# Altium PCB ZYNQ-HS-DEV-PCB.PcbDoc (part 6 of 10)
Units mm, origin at the board's own origin, x right, y up, seen from the top; angles counter-clockwise.
Board outline 125.25 x 111 mm, 10 copper layers (S1 (SIG), S2 (GND), S3 (SIG), S4 (GND), S5 (PWR), S6 (SIG), S7 (GND), S8 (SIG), S9 (GND), S10 (SIG)), stack 1.597 mm thick; 539 components, 408 nets, 2443 pads, 876 vias.
Unrouted connection lines stored in the file: 1310.
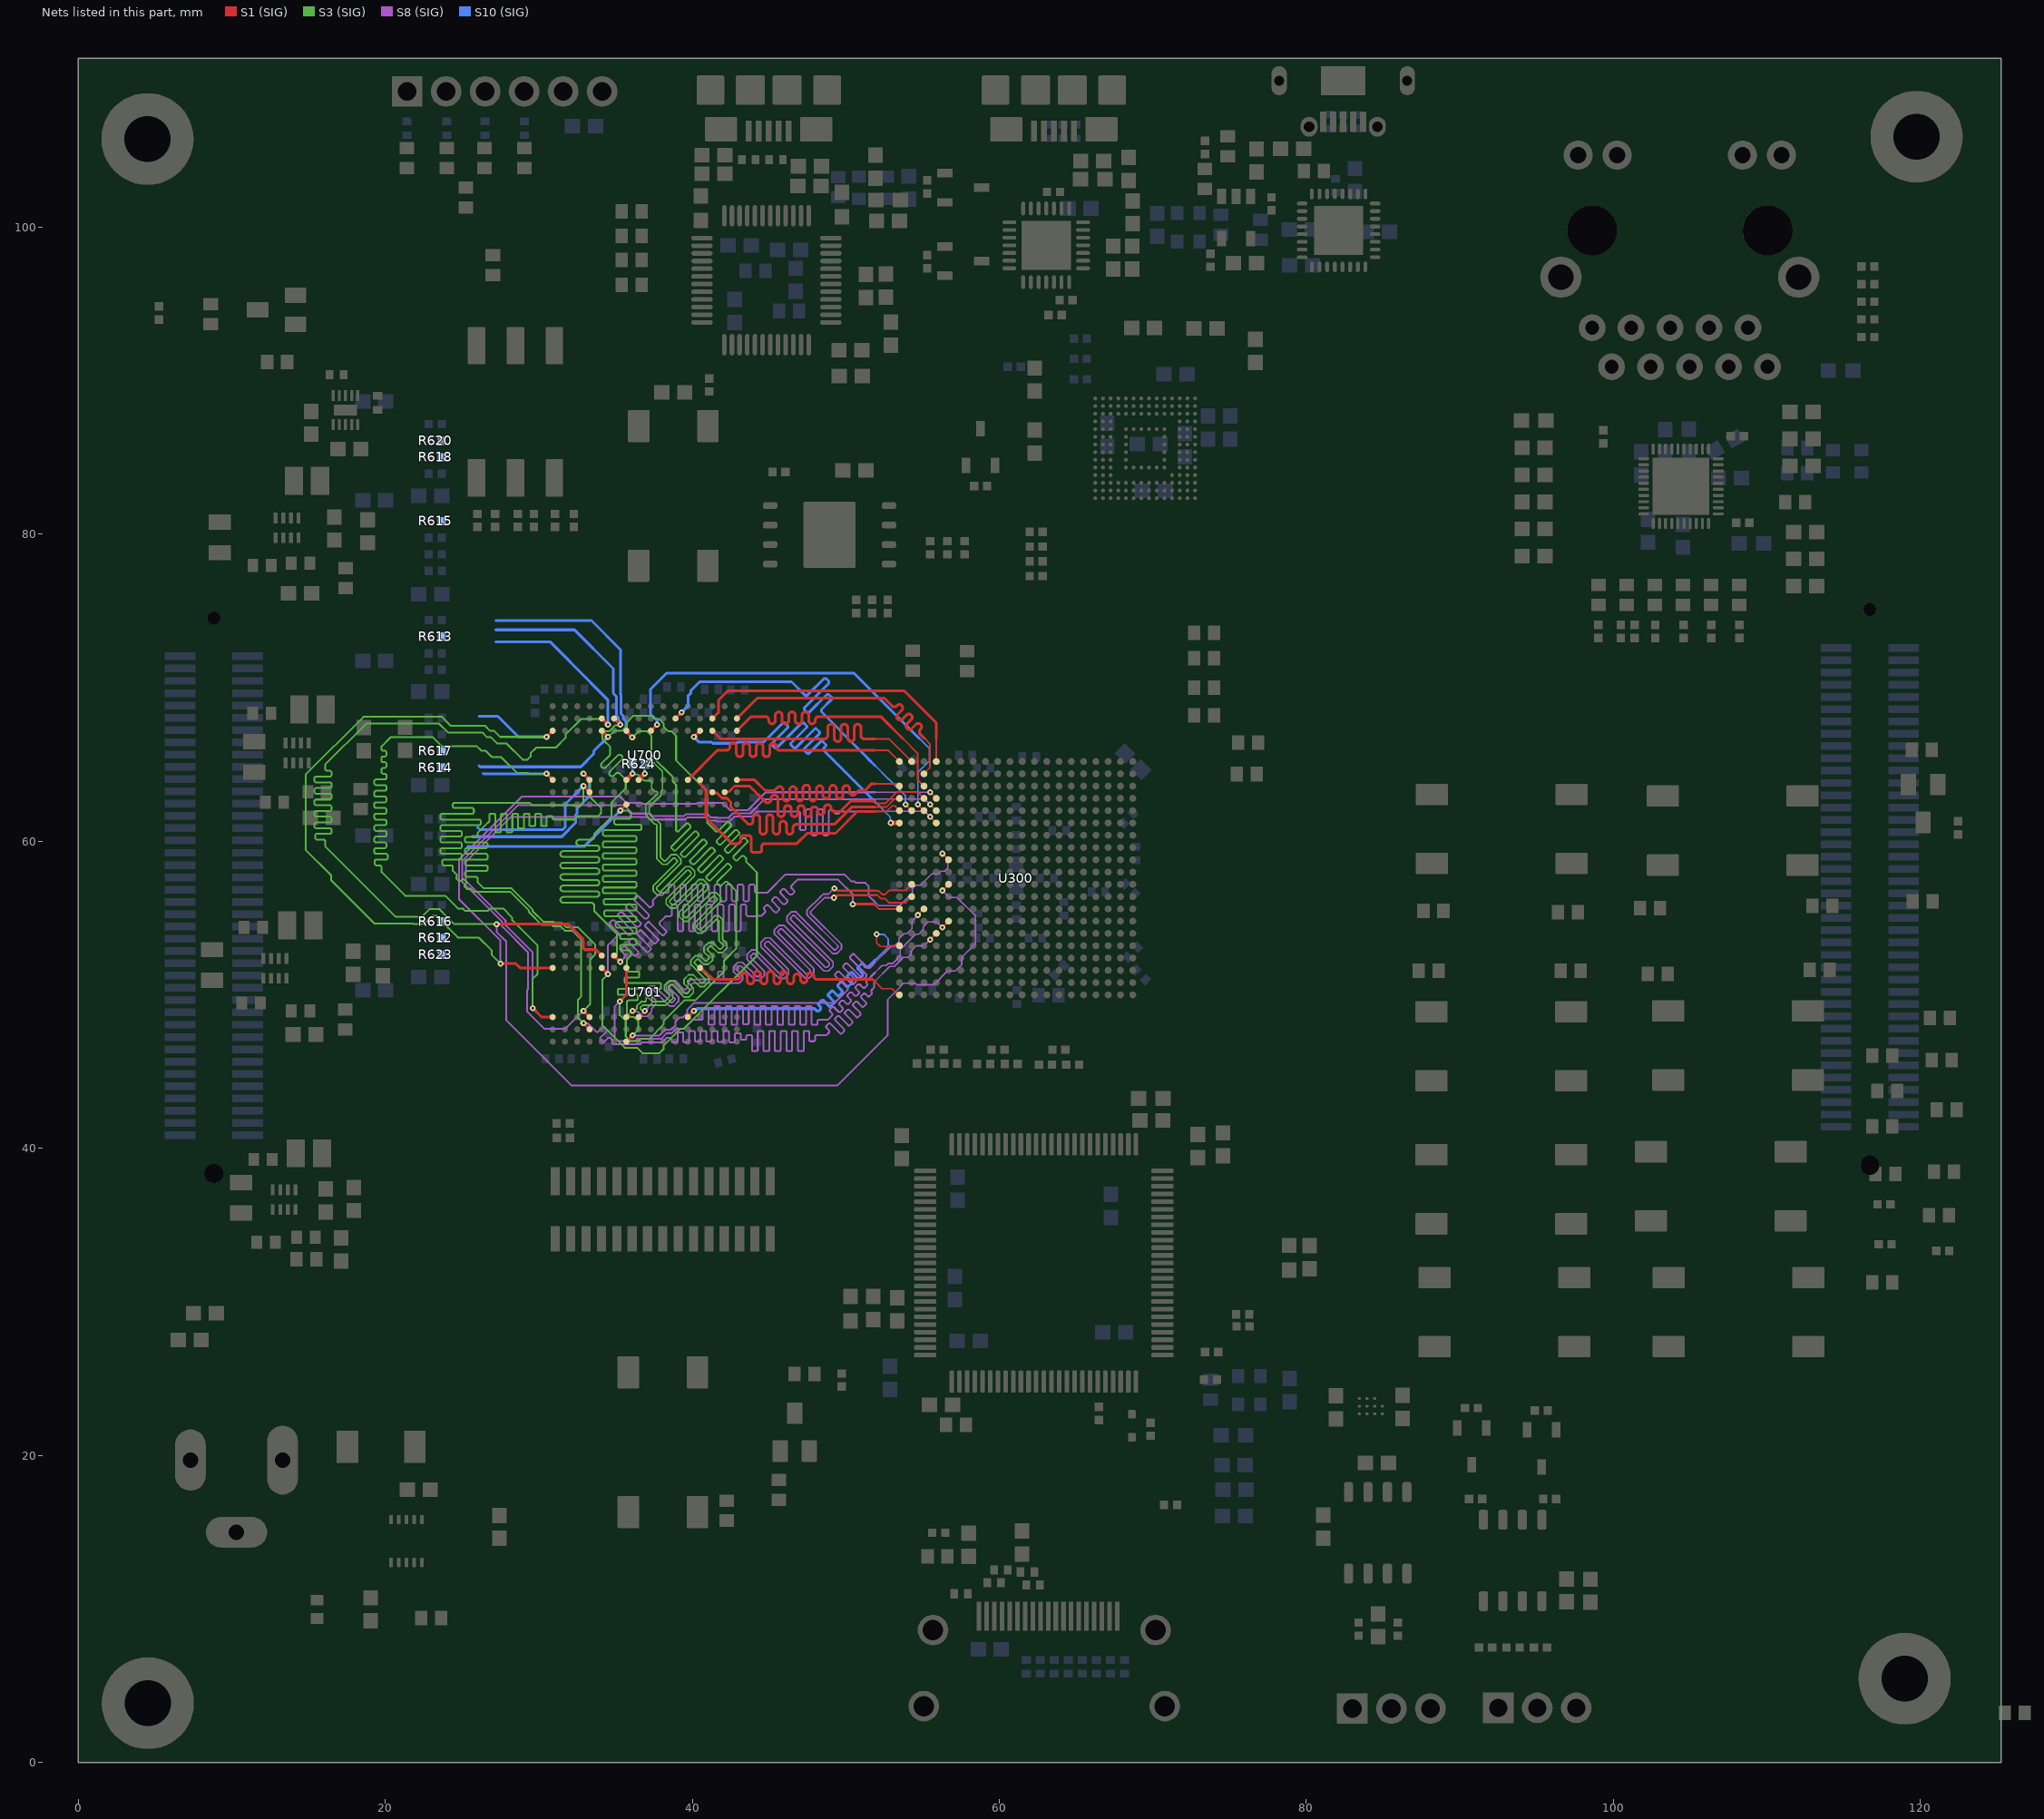
[diagram p10: the nets of this part, all layers, seen from the top]

## Via types
v1: diameter 0.4, hole 0.15, S1 (SIG) to S10 (SIG), tented both sides, 746 vias
v2: diameter 0.5, hole 0.25, S1 (SIG) to S10 (SIG), tented both sides, 108 vias
v3: diameter 0.5, hole 0.2, S1 (SIG) to S10 (SIG), tented both sides, 11 vias
v4: diameter 0.6, hole 0.3, S1 (SIG) to S10 (SIG), tented both sides, 10 vias
v5: diameter 0.45, hole 0.15, S1 (SIG) to S10 (SIG), tented both sides, 1 vias

## Nets (pads, with @x,y where several pads share a name; then routed paths per layer and width w, separated by ;. In a path a pad name is that pad's centre, name@x,y a point inside that pad or via, vN(x,y) a via of type N, cw(c..) or ccw(c..) an arc to the next point about the centre after c; other vN are vias at no path point) (continued)
DDR_A12: R612.2 U300.E4 U700.N7 U701.N7 | length 110.2
  S1 (SIG) w0.11: v1(55.488,62.395) U300.E4@55.888,61.995
  S1 (SIG) w0.18: v1(32.9,48.95) U701.N7@33.3,48.55 ; v1(32.9,64.4) U700.N7@33.3,64
  S3 (SIG) w0.119: v1(32.9,48.95) 33.34,49.39 33.34,52.299 33.675,52.634 33.675,53.266 32.546,54.395 31.783,54.395 31.51,54.669 31.02,54.669 30.921,54.767 30.283,54.767 29.582,55.468 29.582,55.566 28.216,56.932 26.418,56.932 26,57.35 26,57.55 26,57.61 25.925,57.684 25.265,57.684 25.19,57.759 25.19,57.983 25.265,58.057 26.575,58.057 26.65,58.132 26.65,58.356 26.575,58.431 25.265,58.431 25.19,58.505 25.19,58.729 25.265,58.804 26.575,58.804 26.65,58.878 26.65,59.102 26.575,59.177 25.265,59.177 25.19,59.252 25.19,59.476 25.265,59.55 26.575,59.55 26.65,59.625 26.65,59.849 26.575,59.923 25.265,59.923 25.19,59.998 25.19,60.222 25.265,60.297 25.925,60.297 26,60.371 26,60.448 26,60.525 26.683,61.208 26.743,61.268 ccw(c26.652,61.357) 26.779,61.357 26.779,61.72 cw(c26.854,61.72) 26.854,61.794 27.078,61.794 cw(c27.078,61.72) 27.153,61.72 27.153,60.655 ccw(c27.227,60.655) 27.227,60.58 27.451,60.58 ccw(c27.451,60.655) 27.526,60.655 27.526,61.72 cw(c27.601,61.72) 27.601,61.794 27.824,61.794 cw(c27.824,61.72) 27.899,61.72 27.899,60.655 ccw(c27.974,60.655) 27.974,60.58 28.198,60.58 ccw(c28.198,60.655) 28.272,60.655 28.272,61.72 cw(c28.347,61.72) 28.347,61.794 28.571,61.794 cw(c28.571,61.72) 28.645,61.72 28.645,60.922 ccw(c28.72,60.922) 28.72,60.847 28.944,60.847 ccw(c28.944,60.922) 29.019,60.922 29.019,61.72 cw(c29.093,61.72) 29.093,61.794 29.317,61.794 cw(c29.317,61.72) 29.392,61.72 29.392,61.057 ccw(c29.466,61.057) 29.466,60.983 29.69,60.983 ccw(c29.69,61.057) 29.765,61.057 29.765,61.72 cw(c29.84,61.72) 29.84,61.794 30.064,61.794 cw(c30.064,61.72) 30.138,61.72 30.138,61.057 ccw(c30.213,61.057) 30.213,60.983 30.437,60.983 ccw(c30.437,61.057) 30.511,61.057 30.511,61.566 cw(c30.586,61.566) 30.586,61.64 30.81,61.64 cw(c30.81,61.566) 30.885,61.566 30.885,61.54 ccw(c31.004,61.54) 31.004,61.421 32.34,61.421 32.524,61.605 32.559,61.64 33.849,61.64 34.06,61.851 34.06,62.149 33.34,62.868 33.34,63.96 v1(32.9,64.4)
  S8 (SIG) w0.1: 51.9,62.745 55.138,62.745 v1(55.488,62.395)
  S8 (SIG) w0.119: v1(32.9,48.95) 32.882,48.95 31.722,47.79 30.351,47.79 29.24,48.901 29.24,50.322 29.304,50.385 29.304,52.747 27.61,54.442 27.61,54.749 25.021,57.337 25.021,58.734 28.647,62.36 35.55,62.36 36.104,61.806 37.166,61.806 37.331,61.64 39.449,61.64 39.578,61.769 40.972,61.769 41.176,61.565 41.644,61.565 41.694,61.515 42.324,61.515 42.629,61.821 43.789,61.821 44.713,62.745 51.9,62.745
  S10 (SIG) w0.18: 25.65,60.3 31.49,60.3 32.385,61.195 32.385,61.704 32.49,61.809 32.49,62.142 33.29,62.942 33.29,64.01 v1(32.9,64.4)
DDR_A13: R613.2 U300.D4 U700.T3 U701.T3 | length 90.1
  S1 (SIG) w0.11: v1(55.488,63.195) U300.D4@55.888,62.795
  S1 (SIG) w0.18: v1(27.5,52.025) 27.52,52.045 28.483,52.045 28.778,51.75 U701.T3@30.9,51.75 ; v1(30.5,66.8) U700.T3@30.9,67.2
  S3 (SIG) w0.119: v1(27.5,52.025) 26.935,52.59 26.935,52.874 26.071,53.738 24.722,53.738 23.56,54.9 23.56,54.924 23.349,55.135 23.051,55.135 22.516,54.6 21.845,54.6 21.792,54.653 19.272,54.653 16.466,57.459 16.466,57.779 14.806,59.439 14.806,64.336 18.574,68.104 23.683,68.104 24.264,67.522 26.494,67.522 26.805,67.212 27.063,67.212 27.475,66.8 v1(30.5,66.8)
  S8 (SIG) w0.1: 51.9,63.195 v1(55.488,63.195)
  S8 (SIG) w0.119: v1(27.5,52.025) 27.5,53.535 24.802,56.233 24.802,58.825 28.877,62.9 35.319,62.9 35.724,62.495 36.696,62.495 36.751,62.44 40.249,62.44 40.304,62.495 41.988,62.495 42.443,62.04 43.624,62.04 44.778,63.195 51.9,63.195
  S10 (SIG) w0.18: 26.1,68.15 27.325,68.15 28.675,66.8 v1(30.5,66.8)
DDR_A14: R614.2 U300.F4 U700.T7 U701.T7 | length 108
  S1 (SIG) w0.11: v1(55.488,61.595) U300.F4@55.888,61.195
  S1 (SIG) w0.18: v1(29.6,49.125) 30.175,48.55 U701.T7@30.9,48.55 ; v1(30.5,64.4) U700.T7@30.9,64
  S3 (SIG) w0.119: v1(29.6,49.125) 29.6,51.044 29.917,51.361 29.917,53.204 28.267,54.854 28.267,55.021 27.671,55.617 26.829,55.617 26.688,55.477 25.177,55.477 25.036,55.617 24.726,55.617 23.894,56.45 21.295,56.45 19.755,57.99 19.755,58.3 19.755,58.36 19.68,58.434 19.385,58.434 19.31,58.509 19.31,58.733 19.385,58.807 20.073,58.807 20.148,58.882 20.148,59.106 20.073,59.181 19.362,59.181 19.287,59.255 19.287,59.479 19.362,59.554 19.989,59.554 20.064,59.628 20.064,59.852 19.989,59.927 19.362,59.927 19.287,60.002 19.287,60.226 19.362,60.3 19.989,60.3 20.064,60.375 20.064,60.599 19.989,60.673 19.362,60.673 19.287,60.748 19.287,60.972 19.362,61.047 19.989,61.047 20.064,61.121 20.064,61.345 19.989,61.42 19.362,61.42 19.287,61.494 19.287,61.718 19.362,61.793 19.989,61.793 20.064,61.868 20.064,62.091 19.989,62.166 19.362,62.166 19.287,62.241 19.287,62.465 19.362,62.539 19.989,62.539 20.064,62.614 20.064,62.838 19.989,62.913 19.362,62.913 19.287,62.987 19.287,63.211 19.362,63.286 19.989,63.286 20.064,63.36 20.064,63.584 19.989,63.659 19.362,63.659 19.287,63.734 19.287,63.957 19.362,64.032 19.989,64.032 20.064,64.107 20.064,64.331 19.989,64.405 19.823,64.405 19.748,64.48 19.748,64.704 19.823,64.778 19.989,64.778 20.064,64.853 20.064,65.077 19.989,65.152 19.808,65.152 19.733,65.226 19.733,65.45 19.808,65.525 19.989,65.525 20.064,65.599 20.064,65.823 19.989,65.898 19.83,65.898 19.755,65.973 19.755,66.19 20.28,66.715 20.354,66.789 23.081,66.789 23.663,66.207 25.95,66.207 26.26,65.896 26.519,65.896 26.93,65.485 27.542,65.485 28.588,64.439 29.315,64.439 29.354,64.4 v1(30.5,64.4)
  S8 (SIG) w0.1: 51.9,61.945 55.138,61.945 v1(55.488,61.595)
  S8 (SIG) w0.119: v1(29.6,49.125) 29.6,52.761 27.829,54.532 27.829,54.84 25.24,57.428 25.24,58.643 28.184,61.587 37.075,61.587 37.24,61.421 39.54,61.421 39.669,61.55 40.881,61.55 41.085,61.346 41.553,61.346 41.603,61.296 42.414,61.296 42.72,61.602 43.88,61.602 44.223,61.945 46.5,61.945 46.933,61.945 47.007,61.87 47.007,60.797 47.082,60.722 47.306,60.722 47.381,60.797 47.381,62.007 47.455,62.082 47.679,62.082 47.754,62.007 47.754,60.459 47.828,60.385 48.052,60.385 48.127,60.459 48.127,62.007 48.202,62.082 48.426,62.082 48.5,62.007 48.5,60.459 48.575,60.385 48.799,60.385 48.873,60.459 48.873,61.955 48.948,62.029 49.172,62.029 49.247,61.955 49.247,61.87 49.321,61.795 49.545,61.795 49.62,61.87 49.694,61.945 51.675,61.945 51.9,61.945
  S10 (SIG) w0.18: 26.375,64.425 26.4,64.4 v1(30.5,64.4)
DDR_BA0: R615.2 U300.L5 U700.M2 U701.M2 | length 121.8
  S1 (SIG) w0.11: v1(56.288,56.795) U300.L5@56.688,57.195
  S1 (SIG) w0.18: v1(27.25,54.6) 31.9,54.6 32.875,53.625 32.875,53.527 32.89,53.512 32.89,53.04 32.99,52.94 33.71,52.94 U701.M2@34.1,52.55 ; U700.M2@34.1,68 v1(34.5,67.6)
  S3 (SIG) w0.119: v1(27.25,54.6) 24.48,54.6 23.998,55.082 23.998,55.106 23.531,55.573 22.869,55.573 22.388,55.091 20.657,55.091 16.445,59.303 16.075,59.673 16.075,60.035 16,60.109 15.5,60.109 15.426,60.184 15.426,60.408 15.5,60.483 16.41,60.483 16.484,60.557 16.484,60.781 16.41,60.856 15.449,60.856 15.375,60.93 15.375,61.154 15.449,61.229 16.41,61.229 16.484,61.304 16.484,61.528 16.41,61.602 15.449,61.602 15.375,61.677 15.375,61.901 15.449,61.975 16.41,61.975 16.484,62.05 16.484,62.274 16.41,62.349 15.449,62.349 15.375,62.423 15.375,62.647 15.449,62.722 16.41,62.722 16.484,62.796 16.484,63.02 16.41,63.095 15.449,63.095 15.375,63.17 15.375,63.394 15.449,63.468 16.41,63.468 16.484,63.543 16.484,63.767 16.41,63.841 15.449,63.841 15.375,63.916 15.375,64.14 15.449,64.215 16.41,64.215 16.484,64.289 16.484,64.513 16.41,64.588 16.15,64.588 16.075,64.662 16.075,64.935 16.075,64.985 18.755,67.665 23.501,67.665 24.083,67.084 26.313,67.084 26.623,66.773 26.882,66.773 27.293,66.362 27.905,66.362 28.951,65.315 29.249,65.315 29.46,65.526 29.46,65.737 29.826,66.104 31.112,66.104 31.74,66.732 31.74,66.949 32.751,67.96 34.14,67.96 v1(34.5,67.6)
  S8 (SIG) w0.1: 52.729,48.45 52.729,49.698 53.538,50.506 53.538,50.54 53.743,50.745 54.513,50.745 54.613,50.645 55.715,50.645 56.615,51.545 57.133,51.545 57.538,51.95 57.538,52.423 58.438,53.323 58.438,55.14 57.233,56.345 56.738,56.345 v1(56.288,56.795)
  S8 (SIG) w0.119: v1(27.25,54.6) 27.25,54.095 27.86,53.485 27.86,48.372 32.151,44.081 49.426,44.081 52.729,47.384 52.729,48.45
  S10 (SIG) w0.18: 27.2,73 30.719,73 33.415,70.304 33.415,70.285 34.5,69.2 v1(34.5,67.6)
DDR_BA1: R616.2 U300.R4 U700.N8 U701.N8 | length 114
  S1 (SIG) w0.11: v1(55.488,53.595) U300.R4@55.888,53.995
  S1 (SIG) w0.18: v1(32.9,48.15) U701.N8@33.3,47.75 ; v1(32.9,63.6) U700.N8@33.3,63.2
  S3 (SIG) w0.119: v1(32.9,48.15) 32.54,48.51 32.54,49.672 32.754,49.885 32.754,53.605 32.182,54.176 31.692,54.176 31.419,54.45 30.929,54.45 30.831,54.548 30.192,54.548 29.363,55.377 29.363,55.475 28.125,56.713 25.762,56.713 25.6,56.875 25.558,56.917 25.452,56.917 25.422,56.887 25.316,56.887 25.158,57.045 25.158,57.151 25.27,57.263 25.27,57.369 25.112,57.527 25.006,57.527 24.894,57.415 24.789,57.415 24.63,57.573 24.63,57.678 24.661,57.709 24.661,57.814 24.505,57.97 24.463,58.012 24.4,58.075 24.4,58.3 24.4,58.36 24.325,58.434 23.775,58.434 23.701,58.509 23.701,58.733 23.775,58.807 24.908,58.807 24.983,58.882 24.983,59.106 24.908,59.181 23.65,59.181 23.575,59.255 23.575,59.479 23.65,59.554 24.908,59.554 24.983,59.628 24.983,59.852 24.908,59.927 23.65,59.927 23.575,60.002 23.575,60.226 23.65,60.3 24.911,60.3 24.985,60.375 24.985,60.599 24.911,60.673 23.65,60.673 23.575,60.748 23.575,60.972 23.65,61.047 26.137,61.047 26.212,61.121 26.212,61.345 26.137,61.42 23.65,61.42 23.575,61.494 23.575,61.718 23.65,61.793 25.686,61.793 25.76,61.868 25.76,62.091 25.686,62.166 24.475,62.166 24.4,62.241 24.4,62.443 24.47,62.513 29.381,62.513 29.535,62.36 32.249,62.36 32.309,62.3 32.691,62.3 32.9,62.509 v1(32.9,63.6)
  S8 (SIG) w0.1: 51.9,50.887 52.858,51.845 53.156,51.845 53.747,52.435 54.023,52.435 54.238,52.65 54.238,52.84 54.588,53.19 55.083,53.19 v1(55.488,53.595)
  S8 (SIG) w0.119: v1(32.9,48.15) 33.175,48.15 33.217,48.108 33.745,47.58 33.85,47.58 34.153,47.883 34.259,47.883 34.417,47.724 34.417,47.619 33.986,47.188 33.986,47.082 34.144,46.924 34.25,46.924 34.53,47.204 34.636,47.204 34.794,47.046 34.794,46.846 34.869,46.771 35.032,46.771 36.613,46.771 36.753,46.912 38.043,46.912 38.191,47.06 38.335,47.203 38.542,47.203 cw(c38.542,47.084) 38.661,47.084 38.661,46.972 ccw(c38.736,46.972) 38.736,46.897 38.96,46.897 ccw(c38.96,46.972) 39.035,46.972 39.035,47.481 cw(c39.109,47.481) 39.109,47.556 39.333,47.556 cw(c39.333,47.481) 39.408,47.481 39.408,46.984 ccw(c39.482,46.984) 39.482,46.91 39.706,46.91 ccw(c39.706,46.984) 39.781,46.984 39.781,47.572 cw(c39.856,47.572) 39.856,47.646 40.08,47.646 cw(c40.08,47.572) 40.154,47.572 40.154,47.028 ccw(c40.229,47.028) 40.229,46.954 40.453,46.954 ccw(c40.453,47.028) 40.527,47.028 40.527,47.572 cw(c40.602,47.572) 40.602,47.646 40.826,47.646 cw(c40.826,47.572) 40.901,47.572 40.901,47.028 ccw(c40.975,47.028) 40.975,46.954 41.199,46.954 ccw(c41.199,47.028) 41.274,47.028 41.274,47.572 cw(c41.348,47.572) 41.348,47.646 41.572,47.646 cw(c41.572,47.572) 41.647,47.572 41.647,46.99 ccw(c41.722,46.99) 41.722,46.916 41.945,46.916 ccw(c41.945,46.99) 42.02,46.99 42.02,47.572 cw(c42.095,47.572) 42.095,47.646 42.319,47.646 cw(c42.319,47.572) 42.393,47.572 42.393,46.984 ccw(c42.468,46.984) 42.468,46.91 42.692,46.91 ccw(c42.692,46.984) 42.766,46.984 42.766,47.427 cw(c42.841,47.427) 42.841,47.502 43.065,47.502 cw(c43.065,47.427) 43.14,47.427 43.14,47.159 ccw(c43.214,47.159) 43.214,47.085 43.438,47.085 ccw(c43.438,47.159) 43.513,47.159 43.513,47.291 cw(c43.588,47.291) 43.588,47.365 43.811,47.365 cw(c43.811,47.291) 43.886,47.291 43.886,46.407 ccw(c43.961,46.407) 43.961,46.332 44.185,46.332 ccw(c44.185,46.407) 44.259,46.407 44.259,47.572 cw(c44.334,47.572) 44.334,47.646 44.558,47.646 cw(c44.558,47.572) 44.632,47.572 44.632,46.407 ccw(c44.707,46.407) 44.707,46.332 44.931,46.332 ccw(c44.931,46.407) 45.006,46.407 45.006,47.572 cw(c45.08,47.572) 45.08,47.646 45.304,47.646 cw(c45.304,47.572) 45.379,47.572 45.379,46.407 ccw(c45.453,46.407) 45.453,46.332 45.677,46.332 ccw(c45.677,46.407) 45.752,46.407 45.752,47.572 cw(c45.827,47.572) 45.827,47.646 46.051,47.646 cw(c46.051,47.572) 46.125,47.572 46.125,46.407 ccw(c46.2,46.407) 46.2,46.332 46.424,46.332 ccw(c46.424,46.407) 46.498,46.407 46.498,47.572 cw(c46.573,47.572) 46.573,47.646 46.797,47.646 cw(c46.797,47.572) 46.872,47.572 46.872,46.407 ccw(c46.946,46.407) 46.946,46.332 47.17,46.332 ccw(c47.17,46.407) 47.245,46.407 47.245,47.572 cw(c47.319,47.572) 47.319,47.646 47.543,47.646 cw(c47.543,47.572) 47.618,47.572 47.618,47.046 ccw(c47.693,47.046) 47.693,46.971 47.917,46.971 ccw(c47.917,47.046) 47.991,47.046 47.991,47.246 cw(c48.11,47.246) 48.11,47.365 48.35,47.365 48.729,47.365 48.882,47.518 48.924,47.56 48.924,47.659 48.706,47.877 48.706,47.956 48.891,48.141 48.97,48.141 49.639,47.472 49.718,47.472 49.903,47.657 49.903,47.736 49.284,48.354 49.284,48.433 49.469,48.618 49.548,48.618 50.167,48 50.246,48 50.43,48.184 50.43,48.264 49.924,48.77 49.924,48.849 50.109,49.034 50.188,49.034 50.694,48.528 50.774,48.528 50.958,48.712 50.958,48.791 50.452,49.298 50.452,49.377 50.637,49.562 50.716,49.562 51.061,49.216 51.14,49.216 51.325,49.401 51.325,49.48 50.98,49.826 50.98,49.905 51.164,50.089 51.244,50.089 51.436,49.897 51.516,49.897 51.7,50.081 51.7,50.16 51.662,50.199 51.662,50.298 51.853,50.489 51.853,50.84 51.9,50.887
  S10 (SIG) w0.18: 26,60.925 26.165,60.76 31.554,60.76 31.71,60.916 31.71,62.41 v1(32.9,63.6)
DDR_BA2: R617.2 U300.J5 U700.M3 U701.M3 | length 113.9
  S1 (SIG) w0.11: v1(56.288,59.195) U300.J5@56.688,58.795
  S1 (SIG) w0.18: U701.M3@34.1,51.75 v1(34.5,51.35) ; U700.M3@34.1,67.2 v1(34.5,66.8)
  S3 (SIG) w0.119: v1(34.5,51.35) 34.14,50.99 34.14,48.001 35.589,46.552 36.389,46.552 36.751,46.19 37.849,46.19 38.14,46.482 38.14,46.699 39.232,47.79 39.449,47.79 44.2,52.541 44.2,57.975 43.813,58.362 43.77,58.405 43.493,58.682 43.493,58.788 43.493,58.893 43.335,59.052 43.229,59.052 42.928,58.75 42.822,58.75 42.664,58.909 42.664,59.014 43.588,59.938 43.588,60.044 43.429,60.202 43.324,60.202 42.369,59.247 42.263,59.247 42.105,59.405 42.105,59.511 43.06,60.466 43.06,60.571 42.902,60.73 42.796,60.73 41.841,59.775 41.735,59.775 41.577,59.933 41.577,60.038 42.532,60.994 42.532,61.099 42.374,61.257 42.268,61.257 41.646,60.635 41.54,60.635 41.498,60.677 40.965,61.21 40.965,63.243 38.94,65.268 38.94,66.868 38.649,67.16 38.432,67.16 38.14,67.451 38.14,67.668 37.849,67.96 37.632,67.96 37.413,68.179 36.17,68.179 35.74,67.749 35.74,67.532 35.401,67.193 34.911,67.193 34.519,66.8 v1(34.5,66.8)
  S8 (SIG) w0.1: 51.9,56.035 52.135,55.8 53.511,55.8 54.338,56.626 54.338,56.94 54.543,57.145 54.856,57.145 55.591,57.88 56.043,57.88 56.208,58.045 56.433,58.045 56.638,58.25 56.638,58.54 56.525,58.652 56.525,58.957 v1(56.288,59.195)
  S8 (SIG) w0.119: v1(34.5,51.35) 34.5,53.225 35.15,53.875 35.192,53.917 35.192,54.023 34.619,54.596 34.619,54.702 34.777,54.86 34.882,54.86 35.847,53.896 35.953,53.896 36.111,54.054 36.111,54.159 35.146,55.124 35.146,55.23 35.305,55.388 35.41,55.388 36.375,54.423 36.48,54.423 36.639,54.582 36.639,54.687 35.674,55.652 35.674,55.757 35.832,55.916 35.938,55.916 36.903,54.951 37.008,54.951 37.166,55.109 37.166,55.215 36.202,56.18 36.202,56.285 36.36,56.444 36.466,56.444 37.191,55.718 37.297,55.718 37.455,55.876 37.455,55.982 37.409,56.028 37.409,56.134 37.663,56.387 37.925,56.65 38.331,56.65 38.391,56.65 38.465,56.725 38.465,57.105 38.54,57.179 38.764,57.179 38.839,57.105 38.839,56.167 38.913,56.093 39.137,56.093 39.212,56.167 39.212,57.105 39.286,57.179 39.51,57.179 39.585,57.105 39.585,56.167 39.66,56.093 39.884,56.093 39.958,56.167 39.958,57.105 40.033,57.179 40.257,57.179 40.331,57.105 40.331,56.167 40.406,56.093 40.63,56.093 40.705,56.167 40.705,57.105 40.779,57.179 41.003,57.179 41.078,57.105 41.078,56.167 41.152,56.093 41.376,56.093 41.451,56.167 41.451,57.105 41.526,57.179 41.75,57.179 41.824,57.105 41.824,56.167 41.899,56.093 42.123,56.093 42.197,56.167 42.197,57.105 42.272,57.179 42.496,57.179 42.571,57.105 42.571,56.167 42.645,56.093 42.869,56.093 42.944,56.167 42.944,57.105 43.018,57.179 43.242,57.179 43.317,57.105 43.317,56.167 43.392,56.093 43.615,56.093 43.69,56.167 43.69,57.106 43.765,57.181 43.989,57.181 44.063,57.106 44.063,56.725 44.138,56.65 44.542,56.65 44.875,56.65 46.06,57.835 49.897,57.835 50.334,57.398 50.537,57.398 50.65,57.285 51.27,57.285 51.473,57.082 51.473,56.462 51.9,56.035
  S10 (SIG) w0.18: 26.1,64.925 26.175,64.85 32.727,64.85 33.58,65.703 33.58,65.88 v1(34.5,66.8)
DDR_CAS_B: R620.2 U300.P5 U700.K3 U701.K3 | length 121.6
  S1 (SIG) w0.11: v1(56.288,54.395) U300.P5@56.688,54.795
  S1 (SIG) w0.18: v1(35.275,49.575) 35.7,50 35.7,51.712 U701.K3@35.686,51.725 ; U700.K3@35.686,67.175 v1(36.086,66.775)
  S3 (SIG) w0.119: v1(35.275,49.575) 35.275,48.684 35.66,48.299 35.66,47.282 35.951,46.99 36.5,46.99 36.638,47.129 37.187,47.129 38.14,48.082 38.14,48.299 39.476,49.634 40.183,49.634 42.06,51.511 42.06,52.218 42.86,53.018 42.86,56.765 42.515,57.11 42.473,57.152 42.255,57.37 42.149,57.37 41.874,57.095 41.769,57.095 41.61,57.253 41.61,57.359 42.518,58.266 42.518,58.372 42.36,58.53 42.254,58.53 41.168,57.444 41.063,57.444 40.904,57.603 40.904,57.708 41.99,58.794 41.99,58.9 41.832,59.058 41.726,59.058 40.639,57.971 40.533,57.971 40.375,58.129 40.375,58.235 41.462,59.322 41.462,59.428 41.304,59.586 41.199,59.586 40.113,58.5 40.007,58.5 39.849,58.658 39.849,58.764 40.935,59.85 40.935,59.955 40.776,60.114 40.671,60.114 39.527,58.969 39.421,58.969 39.263,59.128 39.263,59.233 40.407,60.378 40.407,60.483 40.249,60.641 40.143,60.641 38.902,59.401 38.797,59.401 38.638,59.559 38.638,59.665 39.879,60.905 39.879,61.011 39.721,61.169 39.615,61.169 39.088,60.642 38.983,60.642 38.94,60.684 38.94,63.668 38.721,63.887 38.721,64.183 37.34,65.564 37.34,66.868 37.049,67.16 36.478,67.16 36.094,66.775 v1(36.086,66.775)
  S8 (SIG) w0.1: 51.9,51.45 52.35,51.9 52.63,51.9 52.775,52.045 53.058,52.045 53.538,52.525 53.538,52.94 54.543,53.945 54.733,53.945 55.05,54.262 55.05,54.452 55.343,54.745 55.938,54.745 v1(56.288,54.395)
  S8 (SIG) w0.119: v1(35.275,49.575) 34.94,49.24 34.94,47.21 35.16,46.99 36.249,46.99 36.389,47.131 37.952,47.131 38.325,47.504 38.672,47.504 38.964,47.796 39.146,47.796 39.151,47.79 39.449,47.79 40.028,48.37 40.25,48.37 40.563,48.37 ccw(c40.563,48.489) 40.682,48.489 40.682,49.086 cw(c40.757,49.086) 40.757,49.161 40.981,49.161 cw(c40.981,49.086) 41.056,49.086 41.056,48.116 ccw(c41.13,48.116) 41.13,48.042 41.354,48.042 ccw(c41.354,48.116) 41.429,48.116 41.429,49.181 cw(c41.503,49.181) 41.503,49.256 41.727,49.256 cw(c41.727,49.181) 41.802,49.181 41.802,48.116 ccw(c41.877,48.116) 41.877,48.042 42.101,48.042 ccw(c42.101,48.116) 42.175,48.116 42.175,49.181 cw(c42.25,49.181) 42.25,49.256 42.474,49.256 cw(c42.474,49.181) 42.548,49.181 42.548,48.116 ccw(c42.623,48.116) 42.623,48.042 42.847,48.042 ccw(c42.847,48.116) 42.922,48.116 42.922,49.181 cw(c42.996,49.181) 42.996,49.256 43.22,49.256 cw(c43.22,49.181) 43.295,49.181 43.295,48.159 ccw(c43.369,48.159) 43.369,48.085 43.593,48.085 ccw(c43.593,48.159) 43.668,48.159 43.668,49.181 cw(c43.743,49.181) 43.743,49.256 43.966,49.256 cw(c43.966,49.181) 44.041,49.181 44.041,48.116 ccw(c44.116,48.116) 44.116,48.042 44.34,48.042 ccw(c44.34,48.116) 44.414,48.116 44.414,49.181 cw(c44.489,49.181) 44.489,49.256 44.713,49.256 cw(c44.713,49.181) 44.788,49.181 44.788,48.116 ccw(c44.862,48.116) 44.862,48.042 45.086,48.042 ccw(c45.086,48.116) 45.161,48.116 45.161,49.181 cw(c45.235,49.181) 45.235,49.256 45.459,49.256 cw(c45.459,49.181) 45.534,49.181 45.534,48.116 ccw(c45.609,48.116) 45.609,48.042 45.832,48.042 ccw(c45.832,48.116) 45.907,48.116 45.907,49.181 cw(c45.982,49.181) 45.982,49.256 46.206,49.256 cw(c46.206,49.181) 46.28,49.181 46.28,48.116 ccw(c46.355,48.116) 46.355,48.042 46.579,48.042 ccw(c46.579,48.116) 46.653,48.116 46.653,49.181 cw(c46.728,49.181) 46.728,49.256 46.952,49.256 cw(c46.952,49.181) 47.027,49.181 47.027,48.116 ccw(c47.101,48.116) 47.101,48.042 47.325,48.042 ccw(c47.325,48.116) 47.4,48.116 47.4,49.181 cw(c47.474,49.181) 47.474,49.256 47.698,49.256 cw(c47.698,49.181) 47.773,49.181 47.773,48.116 ccw(c47.848,48.116) 47.848,48.042 48.072,48.042 ccw(c48.072,48.116) 48.146,48.116 48.146,48.25 cw(c48.265,48.25) 48.265,48.37 48.325,48.37 48.82,48.37 49.113,48.663 49.113,48.769 48.946,48.936 48.946,49.042 49.104,49.2 49.21,49.2 49.535,48.875 49.64,48.875 49.799,49.034 49.799,49.139 49.575,49.363 49.575,49.469 49.733,49.627 49.839,49.627 50.063,49.403 50.168,49.403 50.327,49.561 50.327,49.667 50.103,49.89 50.103,49.996 50.262,50.154 50.367,50.154 50.59,49.931 50.696,49.931 50.854,50.089 50.854,50.195 50.631,50.418 50.631,50.523 50.79,50.682 50.895,50.682 51.118,50.459 51.224,50.459 51.382,50.617 51.382,50.723 51.33,50.775 51.33,50.88 51.9,51.45
  S10 (SIG) w0.18: 27.2,74.375 33.425,74.375 35.325,72.475 35.325,69.563 35.34,69.548 35.34,68.317 35.485,68.172 35.485,67.996 35.69,67.791 35.69,67.172 v1(36.086,66.775)
DDR_CK_N: R624.1 U300.M2 U700.K7 U701.K7 | length 106.7
  S1 (SIG) w0.114: U701.K7@35.7,48.55 v1(36.1,48.95)
  S1 (SIG) w0.121: 51.9,56.475 51.9,56.5 51.912,56.512 52.009,56.512 52.021,56.525 52.025,56.525 52.274,56.276 52.522,56.276 52.788,56.009 53.902,56.009 U300.M2@54.288,56.395
  S1 (SIG) w0.15: v1(49.225,56.325) 49.288,56.325 49.438,56.475 51.9,56.475
  S1 (SIG) w0.3: U700.K7@35.7,64 v1(36.1,64.4)
  S3 (SIG) w0.109: v1(36.1,48.95) 36.156,49.006 36.296,49.006 36.382,49.092 36.382,49.28 36.652,49.549 36.865,49.549 36.919,49.549 36.992,49.622 36.992,50.096 37.064,50.168 37.282,50.168 37.355,50.096 37.355,49.622 37.427,49.549 38.033,49.549 38.166,49.549 38.408,49.792 38.496,49.879 38.496,49.982 38.172,50.305 38.172,50.603 38.465,50.895 38.763,50.895 39.574,50.084 39.676,50.084 39.83,50.238 39.83,50.341 39.46,50.711 39.46,51.009 39.753,51.301 40.051,51.301 40.581,50.771 40.683,50.771 40.837,50.925 40.837,51.028 39.907,51.958 39.907,52.256 40.2,52.548 40.498,52.548 40.829,52.217 40.932,52.217 41.086,52.371 41.086,52.473 40.754,52.805 40.754,53.103 41.046,53.395 41.345,53.395 41.754,52.985 41.857,52.985 42.011,53.139 42.011,53.242 41.725,53.528 41.725,54.05 41.725,54.816 41.638,54.904 41.535,54.904 40.64,54.009 40.342,54.009 40.05,54.301 40.05,54.599 41.609,56.159 41.609,56.261 41.455,56.415 41.353,56.415 39.728,54.79 39.43,54.79 39.137,55.083 39.137,55.381 40.762,57.006 40.762,57.108 40.608,57.262 40.506,57.262 38.881,55.637 38.583,55.637 38.291,55.93 38.291,56.228 39.915,57.852 39.915,57.955 39.761,58.109 39.659,58.109 38.034,56.484 37.736,56.484 37.444,56.776 37.444,57.075 39.01,58.641 39.01,58.744 38.856,58.898 38.754,58.898 38.348,58.492 38.049,58.492 37.834,58.707 37.747,58.795 37.675,58.866 37.675,61.061 37.611,61.125 37.525,61.125 37.108,61.542 37.108,61.608 36.964,61.752 36.964,62.363 37.629,63.028 37.661,63.028 37.725,63.091 37.725,63.182 37.661,63.246 37.553,63.246 37.346,63.453 37.346,63.747 37.387,63.788 37.387,63.878 37.311,63.954 36.842,63.954 36.452,64.344 36.156,64.344 v1(36.1,64.4)
  S8 (SIG) w0.109: v1(36.1,48.95) 36.156,48.894 36.454,48.894 36.753,48.596 37.047,48.596 37.346,48.894 37.346,49.097 37.606,49.357 37.606,49.655 37.175,50.086 37.175,50.189 37.329,50.343 37.432,50.343 38.508,49.267 38.806,49.267 39.098,49.559 39.098,49.857 38.521,50.434 38.521,50.536 38.675,50.69 38.778,50.69 39.354,50.114 39.653,50.114 39.945,50.406 39.945,50.677 40.017,50.75 40.52,50.75 40.529,50.76 41.112,50.76 41.122,50.75 41.266,50.75 41.276,50.76 41.859,50.76 41.868,50.75 42.013,50.75 42.022,50.76 42.605,50.76 42.615,50.75 42.759,50.75 42.769,50.76 43.046,50.76 43.103,50.816 43.259,50.973 43.259,51.271 42.909,51.621 42.909,51.724 43.063,51.878 43.166,51.878 44.093,50.95 44.391,50.95 44.683,51.242 44.683,51.541 43.797,52.427 43.797,52.53 43.951,52.684 44.053,52.684 45.68,51.058 45.978,51.058 46.27,51.35 46.27,51.648 44.702,53.216 44.702,53.319 44.856,53.473 44.958,53.473 47.328,51.103 47.626,51.103 47.918,51.396 47.918,51.694 45.58,54.032 45.58,54.135 45.733,54.289 45.836,54.289 48.575,51.55 48.873,51.55 49.165,51.843 49.165,52.141 46.396,54.91 46.396,55.013 46.55,55.167 46.652,55.167 49.12,52.698 49.419,52.698 49.711,52.991 49.711,53.289 47.695,55.305 47.695,55.408 48.494,56.207 48.612,56.325 v1(49.225,56.325)
  S10 (SIG) w0.15: R624.1@36.075,65.025 36.1,65 v1(36.1,64.4)
DDR_CK_P: R624.2 U300.L2 U700.J7 U701.J7 | length 106.7
  S1 (SIG) w0.114: U701.J7@36.5,48.55 v1(36.9,48.95)
  S1 (SIG) w0.121: 51.9,56.775 52.126,56.775 52.377,56.524 52.532,56.524 52.817,56.809 53.902,56.809 U300.L2@54.288,57.195
  S1 (SIG) w0.15: v1(49.252,56.924) 49.315,56.924 49.465,56.775 51.9,56.775
  S1 (SIG) w0.3: U700.J7@36.5,64 v1(36.9,64.4)
  S3 (SIG) w0.109: v1(36.9,48.95) 36.844,49.006 36.704,49.006 36.618,49.092 36.618,49.182 36.749,49.313 38.263,49.313 38.575,49.625 38.732,49.781 38.732,50.08 38.408,50.403 38.408,50.505 38.562,50.659 38.665,50.659 39.476,49.848 39.774,49.848 40.066,50.141 40.066,50.439 39.696,50.809 39.696,50.911 39.85,51.065 39.953,51.065 40.483,50.535 40.781,50.535 41.073,50.827 41.073,51.126 40.143,52.056 40.143,52.158 40.297,52.312 40.4,52.312 40.731,51.981 41.03,51.981 41.322,52.273 41.322,52.571 40.99,52.903 40.99,53.005 41.144,53.159 41.247,53.159 41.657,52.749 41.955,52.749 42.247,53.042 42.247,53.34 41.961,53.626 41.961,53.814 41.961,54.914 41.892,54.983 41.804,55.071 41.735,55.14 41.437,55.14 40.543,54.245 40.44,54.245 40.286,54.399 40.286,54.502 41.845,56.061 41.845,56.359 41.553,56.651 41.255,56.651 39.63,55.026 39.527,55.026 39.373,55.18 39.373,55.283 40.998,56.908 40.998,57.206 40.706,57.498 40.408,57.498 38.783,55.873 38.68,55.873 38.526,56.027 38.526,56.13 40.151,57.755 40.151,58.053 39.859,58.345 39.561,58.345 37.936,56.72 37.833,56.72 37.68,56.874 37.68,56.977 39.246,58.543 39.246,58.842 38.954,59.134 38.656,59.134 38.25,58.728 38.147,58.728 38.001,58.874 37.914,58.961 37.911,58.964 37.911,61.159 37.709,61.361 37.623,61.361 37.344,61.64 37.344,61.706 37.2,61.85 37.2,62.265 37.727,62.792 37.759,62.792 37.961,62.994 37.961,63.246 38.054,63.339 38.054,64.547 37.501,65.1 36.875,65.1 36.75,64.975 36.75,64.8 36.844,64.706 36.844,64.456 v1(36.9,64.4)
  S8 (SIG) w0.109: v1(36.9,48.95) 37.11,49.159 37.11,49.195 37.37,49.455 37.37,49.558 36.939,49.988 36.939,50.286 37.231,50.579 37.529,50.579 38.605,49.503 38.708,49.503 38.862,49.657 38.862,49.759 38.285,50.336 38.285,50.634 38.578,50.926 38.876,50.926 39.452,50.35 39.555,50.35 39.709,50.504 39.709,50.775 39.92,50.986 40.422,50.986 40.432,50.996 40.805,50.996 41.585,50.996 41.658,51.068 41.658,51.446 41.73,51.519 41.948,51.519 42.021,51.446 42.021,51.068 42.093,50.996 42.662,50.996 42.923,50.996 42.949,50.996 43.023,51.07 43.023,51.173 42.673,51.523 42.673,51.822 42.965,52.114 43.263,52.114 44.191,51.186 44.293,51.186 44.447,51.34 44.447,51.443 43.561,52.33 43.561,52.628 43.853,52.92 44.151,52.92 45.777,51.293 45.88,51.293 46.034,51.447 46.034,51.55 44.466,53.118 44.466,53.416 44.758,53.709 45.056,53.709 47.426,51.339 47.528,51.339 47.682,51.493 47.682,51.596 45.344,53.935 45.344,54.233 45.636,54.525 45.934,54.525 48.672,51.786 48.775,51.786 48.929,51.94 48.929,52.043 46.16,54.812 46.16,55.11 46.452,55.403 46.75,55.403 49.218,52.934 49.321,52.934 49.475,53.088 49.475,53.191 47.459,55.207 47.459,55.505 48.327,56.374 48.514,56.561 48.861,56.561 49.224,56.924 v1(49.252,56.924)
  S10 (SIG) w0.15: v1(36.9,64.4) 36.9,65 R624.2@36.925,65.025
DDR_CKE: R623.2 U300.N3 U700.K9 U701.K9 | length 110.1
  S1 (SIG) w0.11: v1(54.688,55.195) U300.N3@55.088,55.595
  S1 (SIG) w0.18: v1(35.3,62) U700.K9@35.7,62.4 ; U701.K9@35.7,46.95 v1(36.1,47.35)
  S3 (SIG) w0.119: v1(35.3,62) 35.807,62 35.991,61.815 35.991,61.542 35.917,61.468 34.981,61.468 34.906,61.393 34.906,61.169 34.981,61.094 36.606,61.094 36.681,61.02 36.681,60.796 36.606,60.721 34.244,60.721 34.17,60.647 34.17,60.423 34.244,60.348 36.282,60.348 36.357,60.273 36.357,60.049 36.282,59.975 34.234,59.975 34.159,59.9 34.159,59.676 34.234,59.602 36.282,59.602 36.357,59.527 36.357,59.303 36.282,59.228 34.234,59.228 34.159,59.154 34.159,58.93 34.234,58.855 36.282,58.855 36.357,58.781 36.357,58.557 36.282,58.482 34.234,58.482 34.159,58.407 34.159,58.184 34.234,58.109 36.282,58.109 36.357,58.034 36.357,57.81 36.282,57.736 34.234,57.736 34.159,57.661 34.159,57.437 34.234,57.363 36.282,57.363 36.357,57.288 36.357,57.064 36.282,56.989 34.234,56.989 34.159,56.915 34.159,56.691 34.234,56.616 36.282,56.616 36.357,56.541 36.357,56.318 36.282,56.243 34.292,56.243 34.217,56.168 34.217,55.944 34.292,55.87 36.282,55.87 36.357,55.795 36.357,55.571 36.282,55.497 34.33,55.497 34.255,55.422 34.255,55.198 34.33,55.123 36.282,55.123 36.357,55.049 36.357,54.825 36.282,54.75 35.076,54.75 35.002,54.676 35.002,54.452 35.076,54.377 36.282,54.377 36.357,54.302 36.357,54.078 36.282,54.004 35.373,54.004 35.298,53.929 35.298,53.705 35.373,53.631 36.282,53.631 36.357,53.556 36.357,53.332 36.282,53.257 35.373,53.257 35.298,53.183 35.298,52.959 35.373,52.884 35.917,52.884 35.991,52.81 35.991,52.75 35.991,52.55 35.74,52.299 35.74,51.621 ccw(c35.86,51.621) 35.86,51.502 36.466,51.502 cw(c36.466,51.427) 36.54,51.427 36.54,51.203 cw(c36.466,51.203) 36.466,51.129 35.662,51.129 ccw(c35.662,51.054) 35.587,51.054 35.587,50.83 ccw(c35.662,50.83) 35.662,50.756 37.884,50.756 cw(c37.884,50.681) 37.958,50.681 37.958,50.457 cw(c37.884,50.457) 37.884,50.382 35.209,50.382 ccw(c35.209,50.308) 35.135,50.308 35.135,50.084 ccw(c35.209,50.084) 35.209,50.009 36.361,50.009 cw(c36.361,49.935) 36.436,49.935 36.436,49.711 cw(c36.361,49.711) 36.361,49.636 35.86,49.636 ccw(c35.86,49.517) 35.74,49.517 35.74,49.084 35.74,48.801 35.991,48.55 36.209,48.55 36.46,48.299 36.46,47.71 v1(36.1,47.35)
  S8 (SIG) w0.1: 51.9,52.102 52.943,53.145 53.133,53.145 53.45,53.462 53.45,53.652 53.778,53.98 53.968,53.98 54.301,54.313 54.301,54.808 v1(54.688,55.195)
  S8 (SIG) w0.119: v1(36.1,47.35) 37.862,47.35 38.234,47.723 38.581,47.723 38.9,48.041 38.9,48.259 39.171,48.53 39.388,48.53 39.66,48.801 39.66,49.01 40.125,49.475 49.273,49.475 49.356,49.558 49.356,49.559 49.642,49.846 49.644,49.846 50.075,50.277 50.117,50.319 50.117,50.425 49.291,51.251 49.291,51.356 49.45,51.515 49.555,51.515 50.381,50.689 50.487,50.689 50.645,50.847 50.645,50.953 49.819,51.778 49.819,51.884 49.977,52.042 50.083,52.042 51.08,51.045 51.185,51.045 51.344,51.204 51.344,51.309 50.272,52.381 50.272,52.487 50.43,52.645 50.536,52.645 51.437,51.744 51.542,51.744 51.661,51.864 51.9,52.102
  S10 (SIG) w0.18: 25.35,59.65 32.95,59.65 v1(35.3,62)
DDR_CS_B: R618.2 U300.N1 U700.L2 U701.L2 | length 117.6
  S1 (SIG) w0.11: 51.9,55.85 52.155,55.595 U300.N1@53.488,55.595
  S1 (SIG) w0.18: U701.L2@34.9,52.55 v1(35.3,52.15) ; U700.L2@34.9,68 v1(35.3,67.6) ; v1(50.45,55.9) 51.85,55.9 51.9,55.85
  S3 (SIG) w0.119: v1(35.3,52.15) 35.079,52.371 35.079,53.99 33.6,55.469 33.6,55.75 33.6,55.81 ccw(c33.413,55.81) 33.413,55.996 31.587,55.996 cw(c31.587,56.183) 31.4,56.183 cw(c31.587,56.183) 31.587,56.369 33.753,56.369 ccw(c33.753,56.556) 33.94,56.556 ccw(c33.753,56.556) 33.753,56.743 31.587,56.743 cw(c31.587,56.929) 31.4,56.929 cw(c31.587,56.929) 31.587,57.116 33.753,57.116 ccw(c33.753,57.302) 33.94,57.302 ccw(c33.753,57.302) 33.753,57.489 31.587,57.489 cw(c31.587,57.676) 31.4,57.676 cw(c31.587,57.676) 31.587,57.862 33.753,57.862 ccw(c33.753,58.049) 33.94,58.049 ccw(c33.753,58.049) 33.753,58.235 31.587,58.235 cw(c31.587,58.422) 31.4,58.422 cw(c31.587,58.422) 31.587,58.609 33.753,58.609 ccw(c33.753,58.795) 33.94,58.795 ccw(c33.753,58.795) 33.753,58.982 31.587,58.982 cw(c31.587,59.168) 31.4,59.168 cw(c31.587,59.168) 31.587,59.355 33.753,59.355 ccw(c33.753,59.541) 33.94,59.541 ccw(c33.753,59.541) 33.753,59.728 32.624,59.728 cw(c32.624,59.915) 32.438,59.915 cw(c32.624,59.915) 32.624,60.101 33.413,60.101 ccw(c33.413,60.288) 33.6,60.288 33.6,60.462 34.717,61.579 34.717,61.64 34.717,62.509 35.66,63.451 35.66,64.022 35.316,64.366 35.274,64.408 ccw(c35.142,64.276) 35.01,64.408 34.892,64.29 cw(c34.76,64.422) 34.628,64.29 cw(c34.76,64.422) 34.628,64.554 35.389,65.315 ccw(c35.257,65.447) 35.389,65.579 ccw(c35.257,65.447) 35.125,65.579 34.364,64.818 cw(c34.232,64.95) 34.1,64.818 cw(c34.232,64.95) 34.1,65.082 34.593,65.575 ccw(c34.461,65.707) 34.648,65.707 34.648,66.144 34.379,66.412 34.337,66.455 34.14,66.651 34.14,66.949 34.351,67.16 34.568,67.16 34.955,67.546 35.246,67.546 v1(35.3,67.6)
  S8 (SIG) w0.119: v1(35.3,52.15) 35.563,52.412 35.605,52.455 ccw(c35.52,52.539) 35.605,52.623 35.35,52.878 cw(c35.403,52.93) 35.35,52.983 35.509,53.142 cw(c35.561,53.089) 35.614,53.142 36.193,52.562 ccw(c36.246,52.615) 36.299,52.562 36.457,52.721 ccw(c36.404,52.773) 36.457,52.826 35.878,53.405 cw(c35.931,53.458) 35.878,53.511 36.036,53.669 cw(c36.089,53.617) 36.142,53.669 37.024,52.787 ccw(c37.077,52.84) 37.129,52.787 37.288,52.946 ccw(c37.235,52.999) 37.288,53.051 36.406,53.933 cw(c36.459,53.986) 36.406,54.039 36.564,54.197 cw(c36.617,54.144) 36.67,54.197 37.504,53.362 ccw(c37.557,53.415) 37.61,53.362 37.768,53.521 ccw(c37.715,53.573) 37.768,53.626 36.934,54.461 cw(c36.986,54.514) 36.934,54.567 37.092,54.725 cw(c37.145,54.672) 37.197,54.725 38.029,53.893 ccw(c38.082,53.946) 38.135,53.893 38.293,54.051 ccw(c38.24,54.104) 38.293,54.157 37.884,54.566 cw(c37.969,54.65) 37.884,54.734 38.051,54.901 38.275,55.125 38.525,55.125 38.585,55.125 38.659,55.2 38.659,55.799 38.734,55.874 38.958,55.874 39.032,55.799 39.032,54.212 39.107,54.138 39.331,54.138 39.406,54.212 39.406,55.799 39.48,55.874 39.704,55.874 39.779,55.799 39.779,54.212 39.853,54.138 40.077,54.138 40.152,54.212 40.152,55.799 40.227,55.874 40.451,55.874 40.525,55.799 40.525,54.212 40.6,54.138 40.824,54.138 40.898,54.212 40.898,55.799 40.973,55.874 41.197,55.874 41.272,55.799 41.272,54.212 41.346,54.138 41.57,54.138 41.645,54.212 41.645,55.799 41.719,55.874 41.943,55.874 42.018,55.799 42.018,54.212 42.093,54.138 42.317,54.138 42.391,54.212 42.391,55.799 42.466,55.874 42.69,55.874 42.764,55.799 42.764,54.212 42.839,54.138 43.063,54.138 43.138,54.212 43.138,55.799 43.212,55.874 43.436,55.874 43.511,55.799 43.511,55.2 43.585,55.125 43.9,55.125 44.234,55.125 44.24,55.131 44.481,55.131 44.7,55.35 44.742,55.392 44.742,55.498 44.667,55.572 44.667,55.678 44.826,55.836 44.931,55.836 45.394,55.374 45.499,55.374 45.658,55.532 45.658,55.638 45.195,56.1 45.195,56.206 45.353,56.364 45.459,56.364 45.921,55.902 46.027,55.902 46.185,56.06 46.185,56.166 45.723,56.628 45.723,56.734 45.881,56.892 45.987,56.892 46.361,56.518 46.467,56.518 46.625,56.676 46.625,56.781 46.431,56.975 46.431,57.081 46.712,57.362 46.853,57.503 49.492,57.503 50.45,56.545 v1(50.45,55.9)
  S10 (SIG) w0.18: 27.2,73.775 32.325,73.775 34.85,71.25 34.85,69.642 35.06,69.432 35.06,68.201 35.17,68.091 35.17,67.915 35.258,67.827 35.258,67.642 v1(35.3,67.6)
DDR_DM0: U300.A1 U700.E7 | length 19.6
  S1 (SIG) w0.11: 51.9,65.925 52.757,65.925 U300.A1@53.488,65.195
  S1 (SIG) w0.18: U700.E7@39.7,64 41.625,65.925 42.125,65.925 42.215,65.925 ccw(c42.215,66.142) 42.432,66.142 42.432,66.173 cw(c42.649,66.173) 42.866,66.173 42.866,65.721 ccw(c43.083,65.721) 43.3,65.721 43.3,66.173 cw(c43.517,66.173) 43.734,66.173 43.734,65.721 ccw(c43.951,65.721) 44.168,65.721 44.168,66.173 cw(c44.385,66.173) 44.602,66.173 44.602,65.721 ccw(c44.819,65.721) 45.036,65.721 45.036,66.173 cw(c45.253,66.173) 45.47,66.173 45.47,66.142 ccw(c45.687,66.142) 45.687,65.925 46.152,65.925 51.9,65.925
DDR_DM1: U300.F1 U700.D3 | length 27.5
  S1 (SIG) w0.18: v1(40.1,66.8) U700.D3@40.5,67.2
  S1 (SIG) w0.3: v1@52.93,61.195 U300.F1@53.488,61.195
  S10 (SIG) w0.11: 51.9,62.575 52.89,61.585 52.89,61.235 v1(52.925,61.2)
  S10 (SIG) w0.18: v1(40.1,66.8) 40.45,66.45 41.256,66.45 41.321,66.385 42.879,66.385 42.944,66.45 44.45,66.45 44.577,66.45 ccw(c44.564,66.629) 44.69,66.501 45.897,67.709 cw(c45.959,67.647) 46.02,67.709 46.204,67.524 cw(c46.143,67.463) 46.204,67.402 45.201,66.398 ccw(c45.262,66.337) 45.201,66.275 45.385,66.091 ccw(c45.446,66.153) 45.508,66.091 47.125,67.709 cw(c47.186,67.647) 47.248,67.709 47.432,67.524 cw(c47.37,67.463) 47.432,67.402 46.428,66.398 ccw(c46.49,66.337) 46.428,66.275 46.612,66.091 ccw(c46.674,66.153) 46.735,66.091 47.963,67.319 cw(c48.024,67.257) 48.085,67.319 48.269,67.135 cw(c48.208,67.073) 48.269,67.012 47.3,66.042 ccw(c47.361,65.981) 47.3,65.919 47.484,65.735 ccw(c47.545,65.797) 47.607,65.735 48.372,66.501 cw(c48.433,66.439) 48.495,66.501 48.679,66.317 cw(c48.618,66.255) 48.679,66.194 48.607,66.122 ccw(c48.735,65.995) 48.607,65.868 51.099,63.376 51.163,63.312 51.764,62.711 51.9,62.575
DDR_DM2: U300.T1 U701.E7 | length 23.4
  S1 (SIG) w0.11: v1(52,53.95) 52,53.375 52.18,53.195 52.203,53.195 52.253,53.145 52.767,53.145 52.817,53.195 U300.T1@53.488,53.195
  S1 (SIG) w0.18: U701.E7@39.7,48.55 v1(40.1,48.95)
  S10 (SIG) w0.11: 51.9,52.273 52.755,53.128 52.755,53.647 52.47,53.932 52.018,53.932 v1(52,53.95)
  S10 (SIG) w0.18: v1(40.1,48.95) 40.16,48.95 40.31,49.1 47.949,49.1 48.099,48.95 48.224,48.95 ccw(c48.181,49.125) 48.31,49.25 48.239,49.324 cw(c48.301,49.384) 48.241,49.446 48.428,49.627 cw(c48.488,49.565) 48.551,49.625 48.899,49.265 ccw(c48.962,49.325) 49.022,49.263 49.209,49.444 ccw(c49.149,49.506) 49.211,49.566 48.863,49.927 cw(c48.925,49.987) 48.865,50.05 49.052,50.231 cw(c49.112,50.168) 49.175,50.229 49.444,49.95 ccw(c49.506,50.01) 49.567,49.948 49.754,50.129 ccw(c49.694,50.191) 49.756,50.252 49.487,50.53 cw(c49.549,50.59) 49.489,50.653 49.676,50.834 cw(c49.736,50.771) 49.799,50.832 50.058,50.564 ccw(c50.12,50.624) 50.181,50.562 50.368,50.743 ccw(c50.307,50.805) 50.37,50.866 50.111,51.133 cw(c50.173,51.194) 50.113,51.256 50.3,51.437 cw(c50.361,51.375) 50.423,51.435 50.772,51.074 ccw(c50.834,51.135) 50.894,51.072 51.081,51.253 ccw(c51.021,51.316) 51.084,51.376 50.791,51.679 cw(c50.854,51.739) 50.793,51.801 50.98,51.982 cw(c51.041,51.92) 51.103,51.98 51.224,51.856 ccw(c51.353,51.981) 51.48,51.853 51.87,52.243 51.9,52.273
DDR_DM3: U300.Y1 U701.D3 | length 19.9
  S1 (SIG) w0.11: 51.9,50.85 52.35,50.4 53.018,50.4 53.423,49.995 U300.Y1@53.488,49.995
  S1 (SIG) w0.18: U701.D3@40.5,51.75 40.56,51.75 40.777,51.533 40.822,51.533 41.355,51 41.961,51 42.919,51 ccw(c42.919,51.217) 43.136,51.217 cw(c43.353,51.217) 43.57,51.217 43.57,50.923 ccw(c43.787,50.923) 44.004,50.923 44.004,51.317 cw(c44.221,51.317) 44.438,51.317 44.438,50.923 ccw(c44.655,50.923) 44.872,50.923 44.872,51.317 cw(c45.089,51.317) 45.306,51.317 45.306,50.923 ccw(c45.523,50.923) 45.74,50.923 45.74,51.317 cw(c45.957,51.317) 46.174,51.317 46.174,50.923 ccw(c46.391,50.923) 46.608,50.923 46.608,51.142 cw(c46.825,51.142) 47.042,51.142 47.042,51 ccw(c47.259,51) 47.476,51 47.476,51.217 cw(c47.693,51.217) 47.91,51.217 ccw(c48.127,51.217) 48.127,51 48.572,51 51.75,51 51.9,50.85
DDR_DQ0: U300.C3 U700.A3 | length 19.6
  S1 (SIG) w0.11: 53.7,66.7 54.668,65.732 54.668,64.015 U300.C3@55.088,63.595
  S1 (SIG) w0.18: U700.A3@42.9,67.2 43.825,68.125 44.23,68.125 44.754,68.125 cw(c44.754,67.908) 44.971,67.908 44.971,67.864 ccw(c45.188,67.864) 45.405,67.864 45.405,68.212 cw(c45.622,68.212) 45.839,68.212 45.839,67.864 ccw(c46.056,67.864) 46.273,67.864 46.273,68.212 cw(c46.49,68.212) 46.707,68.212 46.707,67.864 ccw(c46.924,67.864) 47.141,67.864 47.141,68.212 cw(c47.358,68.212) 47.575,68.212 47.575,67.864 ccw(c47.792,67.864) 48.009,67.864 48.009,67.908 cw(c48.226,67.908) 48.226,68.125 50.315,68.125 52.275,68.125 53.7,66.7
DDR_DQ1: U300.B3 U700.A2 | length 19.6
  S1 (SIG) w0.11: U300.B3@55.088,64.395 55.468,64.775 55.468,66.357 55.125,66.7
  S1 (SIG) w0.18: U700.A2@42.9,68 44.225,69.325 52.5,69.325 52.941,68.884 53.004,68.821 ccw(c53.158,68.974) 53.311,68.821 53.335,68.845 cw(c53.488,68.691) 53.642,68.845 cw(c53.488,68.691) 53.642,68.538 53.371,68.267 ccw(c53.524,68.113) 53.371,67.96 ccw(c53.524,68.113) 53.678,67.96 53.949,68.231 cw(c54.102,68.077) 54.255,68.231 cw(c54.102,68.077) 54.255,67.924 53.985,67.653 ccw(c54.138,67.5) 53.985,67.346 ccw(c54.138,67.5) 54.292,67.346 54.562,67.617 cw(c54.716,67.464) 54.869,67.617 cw(c54.716,67.464) 54.869,67.31 54.845,67.286 ccw(c54.999,67.133) 54.845,66.98 55.019,66.806 55.083,66.742 55.125,66.7
DDR_DQ2: U300.A2 U700.C3 | length 19.2
  S1 (SIG) w0.11: 51.9,66.67 52.812,66.67 U300.A2@54.288,65.195
  S1 (SIG) w0.18: U700.C3@41.3,67.2 41.83,66.67 48.507,66.67 48.597,66.67 ccw(c48.597,66.887) 48.814,66.887 48.814,67.414 cw(c49.031,67.414) 49.248,67.414 49.248,66.709 ccw(c49.465,66.709) 49.682,66.709 49.682,67.414 cw(c49.899,67.414) 50.116,67.414 50.116,66.709 ccw(c50.333,66.709) 50.55,66.709 50.55,67.414 cw(c50.767,67.414) 50.984,67.414 50.984,66.887 ccw(c51.201,66.887) 51.201,66.67 51.876,66.67 51.9,66.67
DDR_DQ3: U300.A4 U700.C2 | length 19.2
  S1 (SIG) w0.11: U300.A4@55.888,65.195 55.888,66.7
  S1 (SIG) w0.18: U700.C2@41.3,68 41.71,68.41 41.71,69.21 42.3,69.8 53.8,69.8 55.888,67.712 55.888,66.7
DDR_DQ4: U300.D3 U700.B8 | length 19.7
  S1 (SIG) w0.11: 51.9,62.505 51.93,62.475 52.59,62.475 53.33,63.215 54.668,63.215 U300.D3@55.088,62.795
  S1 (SIG) w0.18: U700.B8@42.1,63.2 42.142,63.242 42.391,63.242 42.738,63.59 43.735,63.59 44.757,62.568 ccw(c44.91,62.722) 45.127,62.722 45.127,62.803 cw(c45.344,62.803) 45.561,62.803 45.561,61.812 ccw(c45.778,61.812) 45.995,61.812 45.995,62.12 cw(c46.212,62.12) 46.429,62.12 46.429,61.812 ccw(c46.646,61.812) 46.863,61.812 46.863,62.12 cw(c47.08,62.12) 47.297,62.12 47.297,61.812 ccw(c47.514,61.812) 47.731,61.812 47.731,62.03 cw(c47.948,62.03) 48.165,62.03 48.165,61.95 ccw(c48.382,61.95) 48.599,61.95 48.599,62.167 cw(c48.816,62.167) 49.033,62.167 ccw(c49.25,62.167) 49.25,61.95 49.654,61.95 50.329,62.625 51.78,62.625 51.9,62.505
DDR_DQ5: U300.D1 U700.C8 | length 19.4
  S1 (SIG) w0.11: 51.9,62.225 52.637,62.225 53.156,62.743 53.436,62.743 U300.D1@53.488,62.795
  S1 (SIG) w0.18: U700.C8@41.3,63.2 41.342,63.158 41.591,63.158 41.938,62.81 42.242,62.81 42.49,62.562 42.49,62.258 43.648,61.1 43.738,61.1 ccw(c43.738,61.317) 43.955,61.317 43.955,61.516 cw(c44.172,61.516) 44.389,61.516 44.389,60.675 ccw(c44.606,60.675) 44.823,60.675 44.823,61.516 cw(c45.04,61.516) 45.257,61.516 45.257,60.675 ccw(c45.474,60.675) 45.691,60.675 45.691,61.098 cw(c45.908,61.098) 46.125,61.098 46.125,60.675 ccw(c46.342,60.675) 46.559,60.675 46.559,60.883 cw(c46.776,60.883) 46.776,61.1 47.575,61.1 49.25,61.1 50.375,62.225 51.9,62.225
DDR_DQ6: U300.C1 U700.A7 | length 19.7
  S1 (SIG) w0.11: 51.9,63.75 53.282,63.75 53.438,63.595 U300.C1@53.488,63.595
  S1 (SIG) w0.18: U700.A7@42.9,64 44.047,63.999 44.746,63.3 45.25,63.3 45.34,63.3 45.47,63.43 45.47,63.436 45.6,63.566 45.774,63.566 45.904,63.436 45.904,62.747 46.034,62.617 46.208,62.617 46.338,62.747 46.338,63.436 46.468,63.566 46.642,63.566 46.772,63.436 46.772,62.747 46.902,62.617 47.076,62.617 47.206,62.747 47.206,63.53 47.336,63.66 47.51,63.66 47.64,63.53 47.64,62.747 47.77,62.617 47.944,62.617 48.074,62.747 48.074,63.481 48.204,63.611 48.378,63.611 48.508,63.481 48.508,62.915 48.638,62.785 48.812,62.785 48.942,62.915 48.942,63.51 49.072,63.64 49.246,63.64 49.376,63.51 49.376,62.915 49.506,62.785 49.68,62.785 49.81,62.915 49.81,63.503 49.94,63.633 50.114,63.633 50.244,63.503 50.244,63.128 50.374,62.998 50.548,62.998 50.678,63.128 50.678,63.171 50.808,63.301 51.227,63.302 51.675,63.75 51.875,63.75 51.9,63.75
DDR_DQ7: U300.E1 U700.D7 | length 18.8
  S1 (SIG) w0.11: 51.9,61.945 52.654,61.945 53.021,62.312 53.17,62.312 U300.E1@53.488,61.995
  S1 (SIG) w0.18: U700.D7@40.5,64 40.542,63.958 40.542,63.709 40.89,63.362 40.89,61.535 41.163,61.262 42.575,59.85 42.875,59.85 42.965,59.85 ccw(c42.965,60.03) 43.145,60.03 43.145,60.226 cw(c43.283,60.226) 43.283,60.364 43.695,60.364 cw(c43.695,60.226) 43.833,60.226 43.833,59.422 ccw(c43.971,59.422) 43.971,59.285 44.383,59.285 ccw(c44.383,59.422) 44.521,59.422 44.521,59.67 cw(c44.701,59.67) 44.701,59.85 45.875,59.85 46.8,59.85 47.475,60.525 49.325,60.525 50.745,61.945 51.9,61.945
DDR_DQ8: U300.E2 U700.F2 | length 27.4
  S1 (SIG) w0.11: v1(53.888,62.395) U300.E2@54.288,61.995
  S1 (SIG) w0.18: U700.F2@38.9,68 v1(39.3,68.4)
  S10 (SIG) w0.11: 51.9,64.923 52.778,64.045 52.805,64.045 53.888,62.962 v1(53.888,62.395)
  S10 (SIG) w0.18: v1(39.3,68.4) 39.71,68.81 39.71,69.466 39.907,69.663 39.907,69.825 40.471,70.39 46.46,70.39 47.275,69.575 47.339,69.511 47.488,69.511 48.585,70.609 48.708,70.609 48.892,70.424 48.892,70.302 47.288,68.698 47.288,68.575 47.473,68.391 47.595,68.391 48.761,69.557 48.884,69.557 49.068,69.373 49.068,69.251 48.408,68.591 48.408,68.442 49.619,67.231 49.619,67.204 51.373,65.45 51.436,65.386 51.9,64.923
DDR_DQ9: U300.E3 U700.H3 | length 28.2
  S1 (SIG) w0.11: v1(54.688,62.395) U300.E3@55.088,61.995
  S1 (SIG) w0.18: U700.H3@37.3,67.2 v1(37.7,67.6)
  S10 (SIG) w0.11: v1(54.688,62.395) 54.688,64.488 55.448,65.248 55.448,66.027 54.775,66.7
  S10 (SIG) w0.18: v1(37.7,67.6) 37.7,67.905 37.594,68.01 37.538,68.01 37.265,68.283 37.265,68.866 37.26,68.871 37.26,69.885 38.325,70.95 50.525,70.95 54.775,66.7